# Altium PCB 606-100861-r02.pcbdoc (part 1 of 3)
Units mm, origin at the board's own origin, x right, y up, seen from the top; angles counter-clockwise.
Board outline 64 x 17.5 mm, 4 copper layers (Top Layer, Ground, Power, Bottom Layer), stack 1.551 mm thick; 99 components, 69 nets, 422 pads, 178 vias.
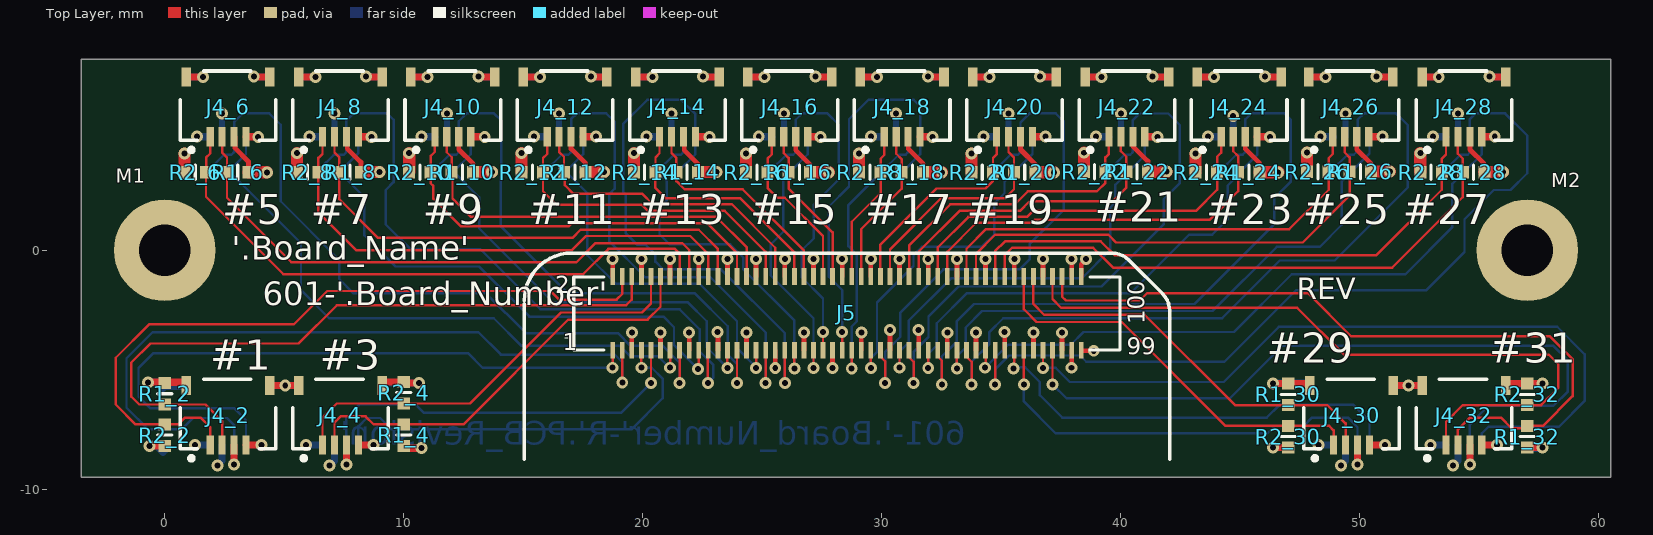
[diagram p0: Top Layer view]
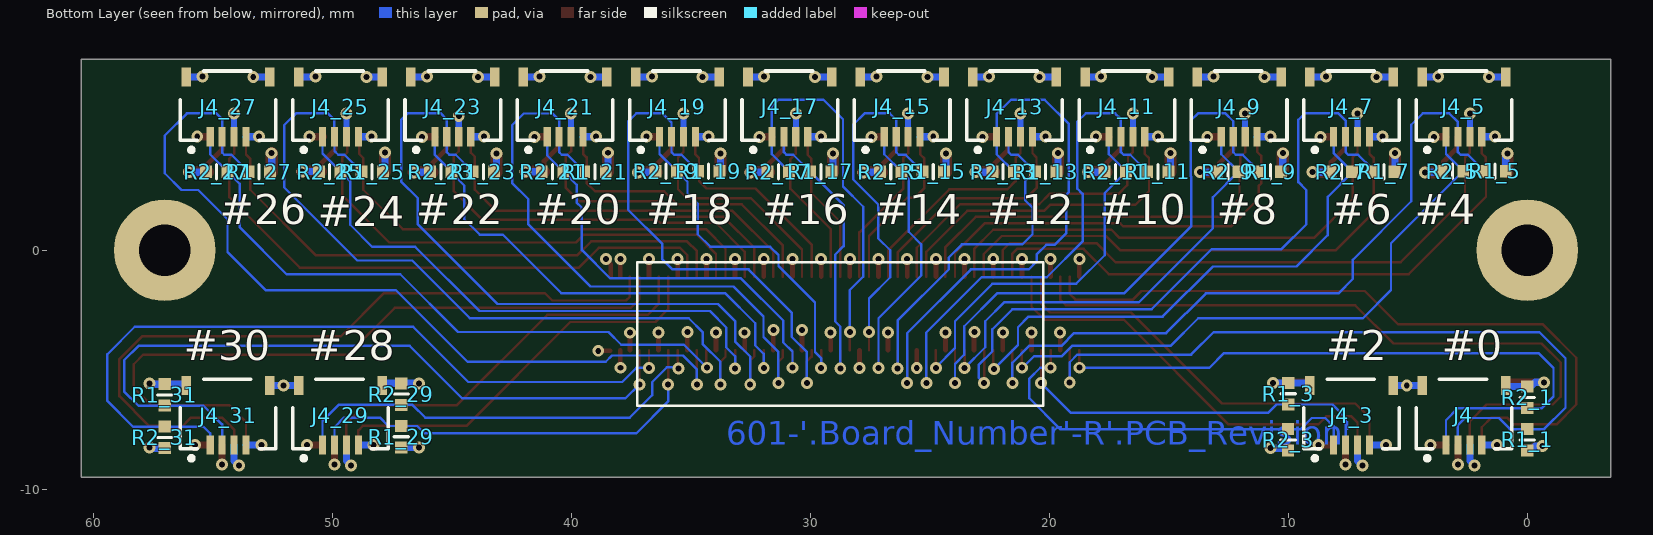
[diagram p1: Bottom Layer view, seen from below]
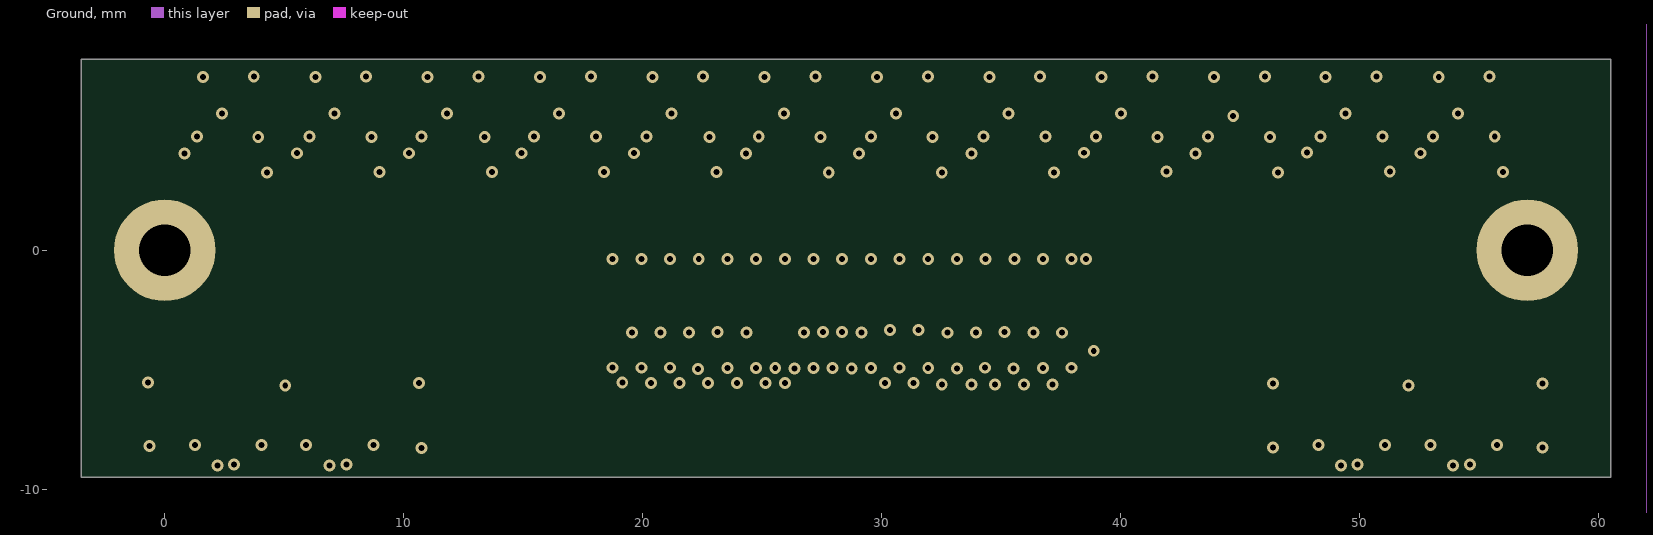
[diagram p2: Ground]
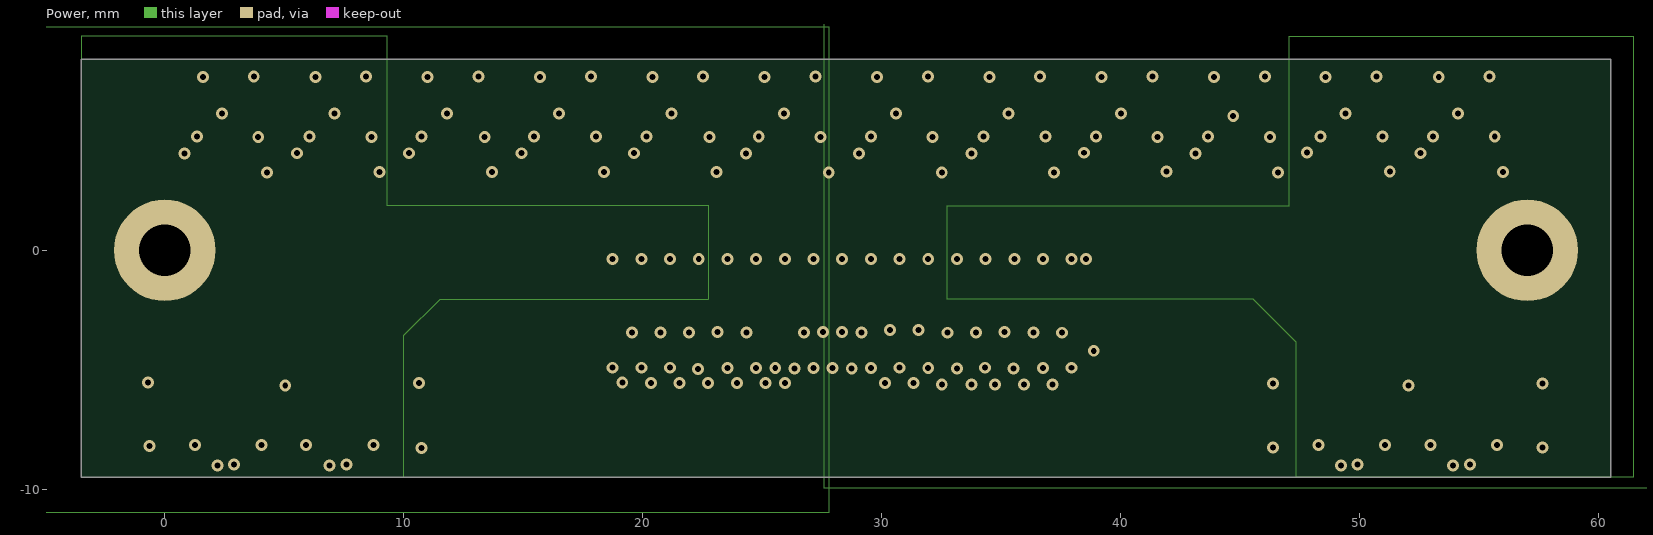
[diagram p3: Power]

## Layer stack, top to bottom
Top Solder: solder mask 0.0102, Solder Resist, Dk 3.5
Top Layer: signal copper 0.0356
Dielectric 1: core 0.254, FR-4, Dk 4.2
Ground: signal copper 0.036
Dielectric 3: prepreg 0.9, Dk 4.2
Power: signal copper 0.036
Dielectric 2: core 0.254, Dk 4.2
Bottom Layer: signal copper 0.0356
Bottom Solder: solder mask 0.0102, Solder Resist, Dk 3.5

## Board outline
-3.5,-9.5 60.5,-9.5 60.5,8 -3.5,8

## Design rules (kind name [scope] priority, off if disabled: settings)
AssemblyTestPointUsage [All] p0 off: scope1count=1 scope1_0_kind=Board scope1_0_value=Board scope2count=1 scope2_0_kind=Board scope2_0_value=Board commentlength=0
AssemblyTestPointUsage [All] p1 off:
AssemblyTestpoint [All] p0 off: scope1count=1 scope1_0_kind=Board scope1_0_value=Board scope2count=1 scope2_0_kind=Board scope2_0_value=Board commentlength=0
AssemblyTestpoint [All] p1 off: testpointundercomponent=TRUE minsize=1.016 maxsize=2.54 preferedsize=1.524 minholesize=0 maxholesize=1.016 preferedholesize=0.813 testpointgrid=0.025 usegrid=TRUE gridtolerance=0 allowsidetop=TRUE allowsidebottom=TRUE
BoardOutlineClearance [All] p0: scope1count=1 scope1_0_kind=Board scope1_0_value=Board scope2count=1 scope2_0_kind=Board scope2_0_value=Board commentlength=0 gap=0.25
BoardOutlineClearance [All] p1: gap=0.25 except(0: Text-OutlineEdge)
Clearance Clearance_1 [All] p0 off: scope1count=1 scope1_0_kind=Board scope1_0_value=Board scope2count=1 scope2_0_kind=Net scope2_0_value=GND commentlength=69 gap=0.254 // Protel DXP Scope 1 Expression Was: InNamedPolygon('VCC_3V3_CORE')
Clearance PWR [All] p0: scope1count=1 scope1_0_kind=Layer scope1_0_value=MID2 scope2count=1 scope2_0_kind=Board scope2_0_value=Board commentlength=0 gap=0.2
Clearance ANT_PIN [All] p0: scope1count=1 scope1_0_kind=PadClass scope1_0_value=RADIO_PIN scope2count=1 scope2_0_kind=Board scope2_0_value=Board commentlength=0 gap=0.25
Clearance Keepout_clear [All] p0 off: scope1count=1 scope1_0_kind=Board scope1_0_value=Board scope2count=1 scope2_0_kind=Layer scope2_0_value=TOP commentlength=48 gap=0 // Protel DXP Scope 1 Expression Was: IsKeepOut
Clearance Narrow_clearance [All] p0: scope1count=1 scope1_0_kind=NetClass scope1_0_value=Narrow scope2count=1 scope2_0_kind=Board scope2_0_value=Board commentlength=0 gap=0.08
Clearance [All] p0: scope1count=1 scope1_0_kind=Board scope1_0_value=Board scope2count=1 scope2_0_kind=Board scope2_0_value=Board commentlength=0 gap=0.1
Clearance RF_Clearance [All] p0: scope1count=1 scope1_0_kind=NetClass scope1_0_value=RF scope2count=1 scope2_0_kind=Board scope2_0_value=Board commentlength=0 gap=0.125
Clearance Polygon_Clearance [All] p0 off: scope1count=1 scope1_0_kind=Board scope1_0_value=Board scope2count=1 scope2_0_kind=Board scope2_0_value=Board commentlength=48 gap=0.1 // Protel DXP Scope 1 Expression Was: InPolygon
Clearance Clearance_1 [InNamedPolygon('VCC_3V3_CORE') vs InNet('GND')] p1: gap=0.254
Clearance PWR [OnLayer('Power')] p2: gap=0.2
Clearance ANT_PIN [InPadClass('RADIO_PIN')] p3: gap=0.25
Clearance Keepout_clear [IsKeepOut vs OnLayer('Top Layer')] p4: gap=0
Clearance Polygon_Clearance [InPolygon] p5: gap=0.1
Clearance Narrow_clearance [InNetClass('Narrow')] p6: gap=0.08
Clearance RF_Clearance [InNetClass('RF')] p7: gap=0.125
Clearance [All] p8: gap=0.1 except(0: Arc-Region Track-Region SMDPad-Region THPad-Region Via-Region Fill-Region Region-Region)
ComponentClearance [All] p0: scope1count=1 scope1_0_kind=Board scope1_0_value=Board scope2count=1 scope2_0_kind=Board scope2_0_value=Board commentlength=0 gap=0.18 collisioncheckmode=3
ComponentClearance [All] p1: gap=0.18 collisioncheckmode=3 verticalgap=0.18 showdistances=FALSE
DiffPairsRouting [All] p0: scope1count=1 scope1_0_kind=Board scope1_0_value=Board scope2count=1 scope2_0_kind=Board scope2_0_value=Board commentlength=0
DiffPairsRouting [All] p1: maxlimit=0.152 minlimit=0.152 mostfreqgap=0.152 toplayer_minwidth=0.25 toplayer_maxwidth=0.318 toplayer_prefwidth=0.318 midlayer1_minwidth=0.25 midlayer1_maxwidth=0.318 midlayer1_prefwidth=0.318 midlayer2_minwidth=0.25 midlayer2_maxwidth=0.318 midlayer2_prefwidth=0.318 bottomlayer_minwidth=0.25 bottomlayer_maxwidth=0.318 bottomlayer_prefwidth=0.318 maxuncoupledlength=12.7
FabricationTestPointUsage [All] p0 off: scope1count=1 scope1_0_kind=Board scope1_0_value=Board scope2count=1 scope2_0_kind=Board scope2_0_value=Board commentlength=0 valid=0 allowmultiple=FALSE
FabricationTestPointUsage [All] p1 off: valid=0 allowmultiple=FALSE
FabricationTestpoint [All] p0 off: scope1count=1 scope1_0_kind=Board scope1_0_value=Board scope2count=1 scope2_0_kind=Board scope2_0_value=Board commentlength=0 side=3 testpointundercomponent=TRUE minsize=1.016 maxsize=2.54 preferedsize=1.524 minholesize=0 maxholesize=1.016 preferedholesize=0.813 testpointgrid=0.025
FabricationTestpoint [All] p1 off: side=3 testpointundercomponent=TRUE minsize=1.016 maxsize=2.54 preferedsize=1.524 minholesize=0 maxholesize=1.016 preferedholesize=0.813 testpointgrid=0.025 allowsidetop=TRUE allowsidebottom=TRUE usegrid=TRUE gridtolerance=0
FanoutControl Fanout_Default [All] p0: scope1count=1 scope1_0_kind=Board scope1_0_value=Board scope2count=1 scope2_0_kind=Board scope2_0_value=Board commentlength=30 // Fanout_Default (Default Rule)
FanoutControl Fanout_Small [All] p0 off: scope1count=1 scope1_0_kind=Board scope1_0_value=Board scope2count=1 scope2_0_kind=Board scope2_0_value=Board commentlength=84 // Protel DXP Scope 1 Expression Was: (CompPinCount < 5)   Fanout_Small (Default Rule)
FanoutControl Fanout_SOIC [All] p0 off: scope1count=1 scope1_0_kind=Board scope1_0_value=Board scope2count=1 scope2_0_kind=Board scope2_0_value=Board commentlength=71 // Protel DXP Scope 1 Expression Was: IsSOIC   Fanout_SOIC (Default Rule)
FanoutControl Fanout_LCC [All] p0 off: scope1count=1 scope1_0_kind=Board scope1_0_value=Board scope2count=1 scope2_0_kind=Board scope2_0_value=Board commentlength=69 // Protel DXP Scope 1 Expression Was: IsLCC   Fanout_LCC (Default Rule)
FanoutControl Fanout_BGA [All] p0 off: scope1count=1 scope1_0_kind=Board scope1_0_value=Board scope2count=1 scope2_0_kind=Board scope2_0_value=Board commentlength=69 // Protel DXP Scope 1 Expression Was: IsBGA   Fanout_BGA (Default Rule)
Height [All] p0: scope1count=1 scope1_0_kind=Board scope1_0_value=Board scope2count=1 scope2_0_kind=Board scope2_0_value=Board commentlength=0
HoleSize [All] p0: scope1count=1 scope1_0_kind=Board scope1_0_value=Board scope2count=1 scope2_0_kind=Board scope2_0_value=Board commentlength=0 absolutevalues=TRUE maxlimit=3.5 minlimit=0.025 maxpercent=80.000 minpercent=20.000
HoleSize [All] p1: absolutevalues=TRUE maxlimit=3.5 minlimit=0.025 maxpercent=80.000 minpercent=20.000
HoleToHoleClearance [All] p0: scope1count=1 scope1_0_kind=Board scope1_0_value=Board scope2count=1 scope2_0_kind=Board scope2_0_value=Board commentlength=0
LayerPairs [All] p0: scope1count=1 scope1_0_kind=Board scope1_0_value=Board scope2count=1 scope2_0_kind=Board scope2_0_value=Board commentlength=0 enforce=TRUE
MinimumSolderMaskSliver MinimumSolderMaskSliver_1 [All] p0 off: scope1count=1 scope1_0_kind=Board scope1_0_value=Board scope2count=1 scope2_0_kind=Board scope2_0_value=Board commentlength=44 // Protel DXP Scope 2 Expression Was: IsPad
MinimumSolderMaskSliver [All] p0: scope1count=1 scope1_0_kind=Board scope1_0_value=Board scope2count=1 scope2_0_kind=Board scope2_0_value=Board commentlength=0
MinimumSolderMaskSliver MinimumSolderMaskSliver_1 [isvia vs IsPad] p1: minsoldermaskwidth=0
MinimumSolderMaskSliver [All] p2: minsoldermaskwidth=0.05
NetAntennae [All] p0: scope1count=1 scope1_0_kind=Board scope1_0_value=Board scope2count=1 scope2_0_kind=Board scope2_0_value=Board commentlength=0
PasteMaskExpansion [All] p0: scope1count=1 scope1_0_kind=Board scope1_0_value=Board scope2count=1 scope2_0_kind=Board scope2_0_value=Board commentlength=0 expansion=0
PlaneClearance [All] p0: scope1count=1 scope1_0_kind=Board scope1_0_value=Board scope2count=1 scope2_0_kind=Board scope2_0_value=Board commentlength=0 clearance=0.25
PlaneClearance [All] p1: clearance=0.25
PlaneConnect [All] p0: scope1count=1 scope1_0_kind=Board scope1_0_value=Board scope2count=1 scope2_0_kind=Board scope2_0_value=Board commentlength=0 planeconnectstyle=Direct reliefexpansion=0.508 reliefentries=4 reliefconductorwidth=0.254 reliefairgap=0.254
PlaneConnect [All] p1: planeconnectstyle=Direct reliefexpansion=0.508 reliefentries=4 reliefconductorwidth=0.254 reliefairgap=0.254
PolygonConnect MTG_CONNECT [All] p0: scope1count=1 scope1_0_kind=Footprint scope1_0_value=standoff_hole2p50p scope2count=1 scope2_0_kind=Board scope2_0_value=Board commentlength=0 connectstyle=Relief reliefconductorwidth=0.4 reliefentries=4 polygonreliefangle="90 Angle"
PolygonConnect THPin [All] p0: scope1count=1 scope1_0_kind=Board scope1_0_value=Board scope2count=1 scope2_0_kind=PadClass scope2_0_value=THPin_Polygon commentlength=0 connectstyle=Relief reliefconductorwidth=0.254 reliefentries=4 polygonreliefangle="90 Angle"
PolygonConnect [All] p0: scope1count=1 scope1_0_kind=Board scope1_0_value=Board scope2count=1 scope2_0_kind=Board scope2_0_value=Board commentlength=0 connectstyle=Relief reliefconductorwidth=0.25 reliefentries=4 polygonreliefangle="90 Angle"
PolygonConnect POLY_VIA [All] p0 off: scope1count=1 scope1_0_kind=Board scope1_0_value=Board scope2count=1 scope2_0_kind=Board scope2_0_value=Board commentlength=48 connectstyle=Direct reliefconductorwidth=0.254 reliefentries=4 polygonreliefangle="90 Angle" // Protel DXP Scope 2 Expression Was: IsPolygon
PolygonConnect MTG_CONNECT [HasFootprint('standoff_hole2p50p')] p1: connectstyle=Relief reliefconductorwidth=0.4 reliefentries=4 polygonreliefangle="90 Angle" airgapwidth=0.25
PolygonConnect THPin [All vs InPadClass('THPin_Polygon')] p2: connectstyle=Relief reliefconductorwidth=0.254 reliefentries=4 polygonreliefangle="90 Angle" airgapwidth=0.254
PolygonConnect POLY_VIA [IsVia vs IsPolygon] p3: connectstyle=Direct reliefconductorwidth=0.254 reliefentries=4 polygonreliefangle="90 Angle" airgapwidth=0.254
PolygonConnect [All] p4: connectstyle=Relief reliefconductorwidth=0.25 reliefentries=4 polygonreliefangle="90 Angle" airgapwidth=0.125
RoomDefinition U_SensorConn320 [All] p0: scope1count=1 scope1_0_kind=ComponentClass scope1_0_value=U_SensorConn320 scope2count=1 scope2_0_kind=Board scope2_0_value=Board commentlength=0 region_x1=0 region_y1=0 region_x2=20000000 region_y2=10000000 confinementstyle=ConfineIn
RoomDefinition SensorBreakout [All] p0: scope1count=1 scope1_0_kind=ComponentClass scope1_0_value=SensorBreakout scope2count=1 scope2_0_kind=Board scope2_0_value=Board commentlength=0 region_x1=0 region_y1=0 region_x2=20000000 region_y2=10000000 confinementstyle=ConfineIn
RoomDefinition U_SensorConn11 [All] p0: scope1count=1 scope1_0_kind=ComponentClass scope1_0_value=U_SensorConn11 scope2count=1 scope2_0_kind=Board scope2_0_value=Board commentlength=0 region_x1=0 region_y1=0 region_x2=20000000 region_y2=10000000 confinementstyle=ConfineIn
RoomDefinition U_SensorConn12 [All] p0: scope1count=1 scope1_0_kind=ComponentClass scope1_0_value=U_SensorConn12 scope2count=1 scope2_0_kind=Board scope2_0_value=Board commentlength=0 region_x1=0 region_y1=0 region_x2=20000000 region_y2=10000000 confinementstyle=ConfineIn
RoomDefinition U_SensorConn13 [All] p0: scope1count=1 scope1_0_kind=ComponentClass scope1_0_value=U_SensorConn13 scope2count=1 scope2_0_kind=Board scope2_0_value=Board commentlength=0 region_x1=0 region_y1=0 region_x2=20000000 region_y2=10000000 confinementstyle=ConfineIn
RoomDefinition U_SensorConn14 [All] p0: scope1count=1 scope1_0_kind=ComponentClass scope1_0_value=U_SensorConn14 scope2count=1 scope2_0_kind=Board scope2_0_value=Board commentlength=0 region_x1=0 region_y1=0 region_x2=20000000 region_y2=10000000 confinementstyle=ConfineIn
RoomDefinition U_SensorConn15 [All] p0: scope1count=1 scope1_0_kind=ComponentClass scope1_0_value=U_SensorConn15 scope2count=1 scope2_0_kind=Board scope2_0_value=Board commentlength=0 region_x1=0 region_y1=0 region_x2=20000000 region_y2=10000000 confinementstyle=ConfineIn
RoomDefinition U_SensorConn16 [All] p0: scope1count=1 scope1_0_kind=ComponentClass scope1_0_value=U_SensorConn16 scope2count=1 scope2_0_kind=Board scope2_0_value=Board commentlength=0 region_x1=0 region_y1=0 region_x2=20000000 region_y2=10000000 confinementstyle=ConfineIn
RoomDefinition U_SensorConn17 [All] p0: scope1count=1 scope1_0_kind=ComponentClass scope1_0_value=U_SensorConn17 scope2count=1 scope2_0_kind=Board scope2_0_value=Board commentlength=0 region_x1=0 region_y1=0 region_x2=20000000 region_y2=10000000 confinementstyle=ConfineIn
RoomDefinition U_SensorConn18 [All] p0: scope1count=1 scope1_0_kind=ComponentClass scope1_0_value=U_SensorConn18 scope2count=1 scope2_0_kind=Board scope2_0_value=Board commentlength=0 region_x1=0 region_y1=0 region_x2=20000000 region_y2=10000000 confinementstyle=ConfineIn
RoomDefinition U_SensorConn29 [All] p0: scope1count=1 scope1_0_kind=ComponentClass scope1_0_value=U_SensorConn29 scope2count=1 scope2_0_kind=Board scope2_0_value=Board commentlength=0 region_x1=0 region_y1=0 region_x2=20000000 region_y2=10000000 confinementstyle=ConfineIn
RoomDefinition U_SensorConn210 [All] p0: scope1count=1 scope1_0_kind=ComponentClass scope1_0_value=U_SensorConn210 scope2count=1 scope2_0_kind=Board scope2_0_value=Board commentlength=0 region_x1=0 region_y1=0 region_x2=20000000 region_y2=10000000 confinementstyle=ConfineIn
RoomDefinition U_SensorConn211 [All] p0: scope1count=1 scope1_0_kind=ComponentClass scope1_0_value=U_SensorConn211 scope2count=1 scope2_0_kind=Board scope2_0_value=Board commentlength=0 region_x1=0 region_y1=0 region_x2=20000000 region_y2=10000000 confinementstyle=ConfineIn
RoomDefinition U_SensorConn212 [All] p0: scope1count=1 scope1_0_kind=ComponentClass scope1_0_value=U_SensorConn212 scope2count=1 scope2_0_kind=Board scope2_0_value=Board commentlength=0 region_x1=0 region_y1=0 region_x2=20000000 region_y2=10000000 confinementstyle=ConfineIn
RoomDefinition U_SensorConn213 [All] p0: scope1count=1 scope1_0_kind=ComponentClass scope1_0_value=U_SensorConn213 scope2count=1 scope2_0_kind=Board scope2_0_value=Board commentlength=0 region_x1=0 region_y1=0 region_x2=20000000 region_y2=10000000 confinementstyle=ConfineIn
RoomDefinition U_SensorConn214 [All] p0: scope1count=1 scope1_0_kind=ComponentClass scope1_0_value=U_SensorConn214 scope2count=1 scope2_0_kind=Board scope2_0_value=Board commentlength=0 region_x1=0 region_y1=0 region_x2=20000000 region_y2=10000000 confinementstyle=ConfineIn
RoomDefinition U_SensorConn215 [All] p0: scope1count=1 scope1_0_kind=ComponentClass scope1_0_value=U_SensorConn215 scope2count=1 scope2_0_kind=Board scope2_0_value=Board commentlength=0 region_x1=0 region_y1=0 region_x2=20000000 region_y2=10000000 confinementstyle=ConfineIn
RoomDefinition U_SensorConn216 [All] p0: scope1count=1 scope1_0_kind=ComponentClass scope1_0_value=U_SensorConn216 scope2count=1 scope2_0_kind=Board scope2_0_value=Board commentlength=0 region_x1=0 region_y1=0 region_x2=20000000 region_y2=10000000 confinementstyle=ConfineIn
RoomDefinition U_SensorConn317 [All] p0: scope1count=1 scope1_0_kind=ComponentClass scope1_0_value=U_SensorConn317 scope2count=1 scope2_0_kind=Board scope2_0_value=Board commentlength=0 region_x1=0 region_y1=0 region_x2=20000000 region_y2=10000000 confinementstyle=ConfineIn
RoomDefinition U_SensorConn318 [All] p0: scope1count=1 scope1_0_kind=ComponentClass scope1_0_value=U_SensorConn318 scope2count=1 scope2_0_kind=Board scope2_0_value=Board commentlength=0 region_x1=0 region_y1=0 region_x2=20000000 region_y2=10000000 confinementstyle=ConfineIn
RoomDefinition U_SensorConn319 [All] p0: scope1count=1 scope1_0_kind=ComponentClass scope1_0_value=U_SensorConn319 scope2count=1 scope2_0_kind=Board scope2_0_value=Board commentlength=0 region_x1=0 region_y1=0 region_x2=20000000 region_y2=10000000 confinementstyle=ConfineIn
RoomDefinition U_SensorConn321 [All] p0: scope1count=1 scope1_0_kind=ComponentClass scope1_0_value=U_SensorConn321 scope2count=1 scope2_0_kind=Board scope2_0_value=Board commentlength=0 region_x1=0 region_y1=0 region_x2=20000000 region_y2=10000000 confinementstyle=ConfineIn
RoomDefinition U_SensorConn322 [All] p0: scope1count=1 scope1_0_kind=ComponentClass scope1_0_value=U_SensorConn322 scope2count=1 scope2_0_kind=Board scope2_0_value=Board commentlength=0 region_x1=0 region_y1=0 region_x2=20000000 region_y2=10000000 confinementstyle=ConfineIn
RoomDefinition U_SensorConn323 [All] p0: scope1count=1 scope1_0_kind=ComponentClass scope1_0_value=U_SensorConn323 scope2count=1 scope2_0_kind=Board scope2_0_value=Board commentlength=0 region_x1=0 region_y1=0 region_x2=20000000 region_y2=10000000 confinementstyle=ConfineIn
RoomDefinition U_SensorConn324 [All] p0: scope1count=1 scope1_0_kind=ComponentClass scope1_0_value=U_SensorConn324 scope2count=1 scope2_0_kind=Board scope2_0_value=Board commentlength=0 region_x1=0 region_y1=0 region_x2=20000000 region_y2=10000000 confinementstyle=ConfineIn
RoomDefinition U_SensorConn425 [All] p0: scope1count=1 scope1_0_kind=ComponentClass scope1_0_value=U_SensorConn425 scope2count=1 scope2_0_kind=Board scope2_0_value=Board commentlength=0 region_x1=0 region_y1=0 region_x2=20000000 region_y2=10000000 confinementstyle=ConfineIn
RoomDefinition U_SensorConn426 [All] p0: scope1count=1 scope1_0_kind=ComponentClass scope1_0_value=U_SensorConn426 scope2count=1 scope2_0_kind=Board scope2_0_value=Board commentlength=0 region_x1=0 region_y1=0 region_x2=20000000 region_y2=10000000 confinementstyle=ConfineIn
RoomDefinition U_SensorConn427 [All] p0: scope1count=1 scope1_0_kind=ComponentClass scope1_0_value=U_SensorConn427 scope2count=1 scope2_0_kind=Board scope2_0_value=Board commentlength=0 region_x1=0 region_y1=0 region_x2=20000000 region_y2=10000000 confinementstyle=ConfineIn
RoomDefinition U_SensorConn428 [All] p0: scope1count=1 scope1_0_kind=ComponentClass scope1_0_value=U_SensorConn428 scope2count=1 scope2_0_kind=Board scope2_0_value=Board commentlength=0 region_x1=0 region_y1=0 region_x2=20000000 region_y2=10000000 confinementstyle=ConfineIn
RoomDefinition U_SensorConn429 [All] p0: scope1count=1 scope1_0_kind=ComponentClass scope1_0_value=U_SensorConn429 scope2count=1 scope2_0_kind=Board scope2_0_value=Board commentlength=0 region_x1=0 region_y1=0 region_x2=20000000 region_y2=10000000 confinementstyle=ConfineIn
RoomDefinition U_SensorConn430 [All] p0: scope1count=1 scope1_0_kind=ComponentClass scope1_0_value=U_SensorConn430 scope2count=1 scope2_0_kind=Board scope2_0_value=Board commentlength=0 region_x1=0 region_y1=0 region_x2=20000000 region_y2=10000000 confinementstyle=ConfineIn
RoomDefinition U_SensorConn431 [All] p0: scope1count=1 scope1_0_kind=ComponentClass scope1_0_value=U_SensorConn431 scope2count=1 scope2_0_kind=Board scope2_0_value=Board commentlength=0 region_x1=0 region_y1=0 region_x2=20000000 region_y2=10000000 confinementstyle=ConfineIn
RoomDefinition U_SensorConn432 [All] p0: scope1count=1 scope1_0_kind=ComponentClass scope1_0_value=U_SensorConn432 scope2count=1 scope2_0_kind=Board scope2_0_value=Board commentlength=0 region_x1=0 region_y1=0 region_x2=20000000 region_y2=10000000 confinementstyle=ConfineIn
RoomDefinition U_SensorConn320 [InComponentClass('U_SensorConn320')] p1: confinementstyle=ConfineIn formatcopy=TRUE lockcomponents=FALSE outline -388.768,-211.633 -337.968,-211.633 -337.968,-186.233 -388.768,-186.233
RoomDefinition SensorBreakout [InComponentClass('SensorBreakout')] p2: confinementstyle=ConfineIn formatcopy=TRUE lockcomponents=FALSE outline -388.768,-211.633 -337.968,-211.633 -337.968,-186.233 -388.768,-186.233
RoomDefinition U_SensorConn432 [InComponentClass('U_SensorConn432')] p3: confinementstyle=ConfineIn formatcopy=TRUE lockcomponents=FALSE outline -388.768,-211.633 -337.968,-211.633 -337.968,-186.233 -388.768,-186.233
RoomDefinition U_SensorConn431 [InComponentClass('U_SensorConn431')] p4: confinementstyle=ConfineIn formatcopy=TRUE lockcomponents=FALSE outline -388.768,-211.633 -337.968,-211.633 -337.968,-186.233 -388.768,-186.233
RoomDefinition U_SensorConn430 [InComponentClass('U_SensorConn430')] p5: confinementstyle=ConfineIn formatcopy=TRUE lockcomponents=FALSE outline -388.768,-211.633 -337.968,-211.633 -337.968,-186.233 -388.768,-186.233
RoomDefinition U_SensorConn429 [InComponentClass('U_SensorConn429')] p6: confinementstyle=ConfineIn formatcopy=TRUE lockcomponents=FALSE outline -388.768,-211.633 -337.968,-211.633 -337.968,-186.233 -388.768,-186.233
RoomDefinition U_SensorConn428 [InComponentClass('U_SensorConn428')] p7: confinementstyle=ConfineIn formatcopy=TRUE lockcomponents=FALSE outline -388.768,-211.633 -337.968,-211.633 -337.968,-186.233 -388.768,-186.233
RoomDefinition U_SensorConn427 [InComponentClass('U_SensorConn427')] p8: confinementstyle=ConfineIn formatcopy=TRUE lockcomponents=FALSE outline -388.768,-211.633 -337.968,-211.633 -337.968,-186.233 -388.768,-186.233
RoomDefinition U_SensorConn426 [InComponentClass('U_SensorConn426')] p9: confinementstyle=ConfineIn formatcopy=TRUE lockcomponents=FALSE outline -388.768,-211.633 -337.968,-211.633 -337.968,-186.233 -388.768,-186.233
RoomDefinition U_SensorConn425 [InComponentClass('U_SensorConn425')] p10: confinementstyle=ConfineIn formatcopy=TRUE lockcomponents=FALSE outline -388.768,-211.633 -337.968,-211.633 -337.968,-186.233 -388.768,-186.233
RoomDefinition U_SensorConn324 [InComponentClass('U_SensorConn324')] p11: confinementstyle=ConfineIn formatcopy=TRUE lockcomponents=FALSE outline -388.768,-211.633 -337.968,-211.633 -337.968,-186.233 -388.768,-186.233
RoomDefinition U_SensorConn323 [InComponentClass('U_SensorConn323')] p12: confinementstyle=ConfineIn formatcopy=TRUE lockcomponents=FALSE outline -388.768,-211.633 -337.968,-211.633 -337.968,-186.233 -388.768,-186.233
RoomDefinition U_SensorConn322 [InComponentClass('U_SensorConn322')] p13: confinementstyle=ConfineIn formatcopy=TRUE lockcomponents=FALSE outline -388.768,-211.633 -337.968,-211.633 -337.968,-186.233 -388.768,-186.233
RoomDefinition U_SensorConn321 [InComponentClass('U_SensorConn321')] p14: confinementstyle=ConfineIn formatcopy=TRUE lockcomponents=FALSE outline -388.768,-211.633 -337.968,-211.633 -337.968,-186.233 -388.768,-186.233
RoomDefinition U_SensorConn319 [InComponentClass('U_SensorConn319')] p15: confinementstyle=ConfineIn formatcopy=TRUE lockcomponents=FALSE outline -388.768,-211.633 -337.968,-211.633 -337.968,-186.233 -388.768,-186.233
RoomDefinition U_SensorConn318 [InComponentClass('U_SensorConn318')] p16: confinementstyle=ConfineIn formatcopy=TRUE lockcomponents=FALSE outline -388.768,-211.633 -337.968,-211.633 -337.968,-186.233 -388.768,-186.233
RoomDefinition U_SensorConn317 [InComponentClass('U_SensorConn317')] p17: confinementstyle=ConfineIn formatcopy=TRUE lockcomponents=FALSE outline -388.768,-211.633 -337.968,-211.633 -337.968,-186.233 -388.768,-186.233
RoomDefinition U_SensorConn216 [InComponentClass('U_SensorConn216')] p18: confinementstyle=ConfineIn formatcopy=TRUE lockcomponents=FALSE outline -388.768,-211.633 -337.968,-211.633 -337.968,-186.233 -388.768,-186.233
RoomDefinition U_SensorConn215 [InComponentClass('U_SensorConn215')] p19: confinementstyle=ConfineIn formatcopy=TRUE lockcomponents=FALSE outline -388.768,-211.633 -337.968,-211.633 -337.968,-186.233 -388.768,-186.233
RoomDefinition U_SensorConn214 [InComponentClass('U_SensorConn214')] p20: confinementstyle=ConfineIn formatcopy=TRUE lockcomponents=FALSE outline -388.768,-211.633 -337.968,-211.633 -337.968,-186.233 -388.768,-186.233
RoomDefinition U_SensorConn213 [InComponentClass('U_SensorConn213')] p21: confinementstyle=ConfineIn formatcopy=TRUE lockcomponents=FALSE outline -388.768,-211.633 -337.968,-211.633 -337.968,-186.233 -388.768,-186.233
RoomDefinition U_SensorConn212 [InComponentClass('U_SensorConn212')] p22: confinementstyle=ConfineIn formatcopy=TRUE lockcomponents=FALSE outline -388.768,-211.633 -337.968,-211.633 -337.968,-186.233 -388.768,-186.233
RoomDefinition U_SensorConn211 [InComponentClass('U_SensorConn211')] p23: confinementstyle=ConfineIn formatcopy=TRUE lockcomponents=FALSE outline -388.768,-211.633 -337.968,-211.633 -337.968,-186.233 -388.768,-186.233
RoomDefinition U_SensorConn210 [InComponentClass('U_SensorConn210')] p24: confinementstyle=ConfineIn formatcopy=TRUE lockcomponents=FALSE outline -388.768,-211.633 -337.968,-211.633 -337.968,-186.233 -388.768,-186.233
RoomDefinition U_SensorConn29 [InComponentClass('U_SensorConn29')] p25: confinementstyle=ConfineIn formatcopy=TRUE lockcomponents=FALSE outline -388.768,-211.633 -337.968,-211.633 -337.968,-186.233 -388.768,-186.233
RoomDefinition U_SensorConn18 [InComponentClass('U_SensorConn18')] p26: confinementstyle=ConfineIn formatcopy=TRUE lockcomponents=FALSE outline -388.768,-211.633 -337.968,-211.633 -337.968,-186.233 -388.768,-186.233
RoomDefinition U_SensorConn17 [InComponentClass('U_SensorConn17')] p27: confinementstyle=ConfineIn formatcopy=TRUE lockcomponents=FALSE outline -388.768,-211.633 -337.968,-211.633 -337.968,-186.233 -388.768,-186.233
RoomDefinition U_SensorConn16 [InComponentClass('U_SensorConn16')] p28: confinementstyle=ConfineIn formatcopy=TRUE lockcomponents=FALSE outline -388.768,-211.633 -337.968,-211.633 -337.968,-186.233 -388.768,-186.233
RoomDefinition U_SensorConn15 [InComponentClass('U_SensorConn15')] p29: confinementstyle=ConfineIn formatcopy=TRUE lockcomponents=FALSE outline -388.768,-211.633 -337.968,-211.633 -337.968,-186.233 -388.768,-186.233
RoomDefinition U_SensorConn14 [InComponentClass('U_SensorConn14')] p30: confinementstyle=ConfineIn formatcopy=TRUE lockcomponents=FALSE outline -388.768,-211.633 -337.968,-211.633 -337.968,-186.233 -388.768,-186.233
RoomDefinition U_SensorConn13 [InComponentClass('U_SensorConn13')] p31: confinementstyle=ConfineIn formatcopy=TRUE lockcomponents=FALSE outline -388.768,-211.633 -337.968,-211.633 -337.968,-186.233 -388.768,-186.233
RoomDefinition U_SensorConn12 [InComponentClass('U_SensorConn12')] p32: confinementstyle=ConfineIn formatcopy=TRUE lockcomponents=FALSE outline -388.768,-211.633 -337.968,-211.633 -337.968,-186.233 -388.768,-186.233
RoomDefinition U_SensorConn11 [InComponentClass('U_SensorConn11')] p33: confinementstyle=ConfineIn formatcopy=TRUE lockcomponents=FALSE outline -388.768,-211.633 -337.968,-211.633 -337.968,-186.233 -388.768,-186.233
RoutingCorners [All] p0: scope1count=1 scope1_0_kind=Board scope1_0_value=Board scope2count=1 scope2_0_kind=Board scope2_0_value=Board commentlength=0 cornerstyle=45-Degree minsetback=2.54 maxsetback=2.54
RoutingLayers [All] p0: scope1count=1 scope1_0_kind=Board scope1_0_value=Board scope2count=1 scope2_0_kind=Board scope2_0_value=Board commentlength=0 top layer=Automatic mid layer 1=Automatic mid layer 2=Automatic bottom layer=Automatic
RoutingPriority [All] p0: scope1count=1 scope1_0_kind=Board scope1_0_value=Board scope2count=1 scope2_0_kind=Board scope2_0_value=Board commentlength=0
RoutingTopology [All] p0: scope1count=1 scope1_0_kind=Board scope1_0_value=Board scope2count=1 scope2_0_kind=Board scope2_0_value=Board commentlength=0 topology=Shortest
RoutingVias [All] p0: scope1count=1 scope1_0_kind=Board scope1_0_value=Board scope2count=1 scope2_0_kind=Board scope2_0_value=Board commentlength=0 holewidth=0.25 width=0.5 viastyle="Through Hole" minholewidth=0.25 minwidth=0.5 maxholewidth=0.25 maxwidth=0.5
RoutingVias [All] p1: holewidth=0.25 width=0.5 viastyle="Through Hole" minholewidth=0.25 minwidth=0.5 maxholewidth=0.25 maxwidth=0.5 useviatemplates=TRUE viatemplateguid#1={2D41CD12-448D-474D-BA40-36D4687D2B42} viatemplatename#1=v50h25m0mx0
ShortCircuit [All] p0: scope1count=1 scope1_0_kind=Board scope1_0_value=Board scope2count=1 scope2_0_kind=Board scope2_0_value=Board commentlength=0 allowed=FALSE
SilkToBoardRegionClearance [All] p0: scope1count=1 scope1_0_kind=Board scope1_0_value=Board scope2count=1 scope2_0_kind=Board scope2_0_value=Board commentlength=0
SilkToSilkClearance [All] p0 off: scope1count=1 scope1_0_kind=Board scope1_0_value=Board scope2count=1 scope2_0_kind=Board scope2_0_value=Board commentlength=0
SilkToSilkClearance [All] p1 off: silktosilkclearance=0
SilkToSolderMaskClearance [All] p0 off: scope1count=1 scope1_0_kind=Board scope1_0_value=Board scope2count=1 scope2_0_kind=Board scope2_0_value=Board commentlength=44 // Protel DXP Scope 1 Expression Was: IsPad
SilkToSolderMaskClearance [IsPad] p1: minsilkscreentomaskgap=0.05 clearancetoexposedcopper=TRUE
SolderMaskExpansion [All] p0: scope1count=1 scope1_0_kind=Board scope1_0_value=Board scope2count=1 scope2_0_kind=Board scope2_0_value=Board commentlength=0 expansion=0.05
SolderMaskExpansion [All] p1: expansion=0.05
UnRoutedNet [All] p0: scope1count=1 scope1_0_kind=Board scope1_0_value=Board scope2count=1 scope2_0_kind=Board scope2_0_value=Board commentlength=0
UnpouredPolygon [All] p0: scope1count=1 scope1_0_kind=Board scope1_0_value=Board scope2count=1 scope2_0_kind=Board scope2_0_value=Board commentlength=0
Width Narrow [All] p0: scope1count=1 scope1_0_kind=NetClass scope1_0_value=Narrow scope2count=1 scope2_0_kind=Board scope2_0_value=Board commentlength=0 maxlimit=0.1 minlimit=0.08 preferedwidth=0.1
Width CRITICAL [All] p0: scope1count=1 scope1_0_kind=NetClass scope1_0_value=MOTOR_DRIVERS scope2count=1 scope2_0_kind=Board scope2_0_value=Board commentlength=0 maxlimit=0.4 minlimit=0.3 preferedwidth=0.4
Width PWR_GND [All] p0: scope1count=1 scope1_0_kind=NetClass scope1_0_value=PWR_GND scope2count=1 scope2_0_kind=Board scope2_0_value=Board commentlength=0 maxlimit=1 minlimit=0.2 preferedwidth=0.3
Width [All] p0: scope1count=1 scope1_0_kind=Board scope1_0_value=Board scope2count=1 scope2_0_kind=Board scope2_0_value=Board commentlength=0 maxlimit=0.508 minlimit=0.1 preferedwidth=0.1
Width RF_Width [All] p0: scope1count=1 scope1_0_kind=NetClass scope1_0_value=RF scope2count=1 scope2_0_kind=Board scope2_0_value=Board commentlength=0 maxlimit=0.59 minlimit=0.2 preferedwidth=0.59
Width Narrow [InNetClass('Narrow')] p1: maxlimit=0.1 minlimit=0.08 preferedwidth=0.1
Width RF_Width [InNetClass('RF')] p2: maxlimit=0.59 minlimit=0.2 preferedwidth=0.59
Width PWR_GND [InNetClass('PWR_GND')] p3: maxlimit=1 minlimit=0.2 preferedwidth=0.3
Width CRITICAL [InNetClass('MOTOR_DRIVERS')] p4: maxlimit=0.4 minlimit=0.3 preferedwidth=0.4
Width [All] p5: maxlimit=0.508 minlimit=0.1 preferedwidth=0.1
18 further rules are at their usual default settings.

## Classes and differential pairs
component class SensorBreakout: J5 M1 M2
channel class SensorConn: U_SensorConn11 U_SensorConn12 U_SensorConn13 U_SensorConn14 U_SensorConn15 U_SensorConn16 U_SensorConn17 U_SensorConn18 U_SensorConn29 U_SensorConn210 U_SensorConn211 U_SensorConn212 U_SensorConn213 U_SensorConn214 U_SensorConn215 U_SensorConn216 U_SensorConn317 U_SensorConn318 U_SensorConn319 U_SensorConn320 U_SensorConn321 U_SensorConn322 U_SensorConn323 U_SensorConn324 U_SensorConn425 U_SensorConn426 U_SensorConn427 U_SensorConn428 U_SensorConn429 U_SensorConn430 U_SensorConn431 U_SensorConn432
net class SENSOR_VCC[1..4]: SENSOR_VCC1 SENSOR_VCC2 SENSOR_VCC3 SENSOR_VCC4
net class SENSOR_B[1..32]: SENSOR_B1 SENSOR_B2 SENSOR_B3 SENSOR_B4 SENSOR_B5 SENSOR_B6 SENSOR_B7 SENSOR_B8 SENSOR_B9 SENSOR_B10 SENSOR_B11 SENSOR_B12 SENSOR_B13 SENSOR_B14 SENSOR_B15 SENSOR_B16 SENSOR_B17 SENSOR_B18 SENSOR_B19 SENSOR_B20 SENSOR_B21 SENSOR_B22 SENSOR_B23 SENSOR_B24 SENSOR_B25 SENSOR_B26 SENSOR_B27 SENSOR_B28 SENSOR_B29 SENSOR_B30 SENSOR_B31 SENSOR_B32
net class SENSOR_A[1..32]: SENSOR_A1 SENSOR_A2 SENSOR_A3 SENSOR_A4 SENSOR_A5 SENSOR_A6 SENSOR_A7 SENSOR_A8 SENSOR_A9 SENSOR_A10 SENSOR_A11 SENSOR_A12 SENSOR_A13 SENSOR_A14 SENSOR_A15 SENSOR_A16 SENSOR_A17 SENSOR_A18 SENSOR_A19 SENSOR_A20 SENSOR_A21 SENSOR_A22 SENSOR_A23 SENSOR_A24 SENSOR_A25 SENSOR_A26 SENSOR_A27 SENSOR_A28 SENSOR_A29 SENSOR_A30 SENSOR_A31 SENSOR_A32
component class U_SensorConn432: J4_32 R1_32 R2_32
component class U_SensorConn431: J4_31 R1_31 R2_31
component class U_SensorConn430: J4_30 R1_30 R2_30
component class U_SensorConn429: J4_29 R1_29 R2_29
component class U_SensorConn428: J4_28 R1_28 R2_28
component class U_SensorConn427: J4_27 R1_27 R2_27
component class U_SensorConn426: J4_26 R1_26 R2_26
component class U_SensorConn425: J4_25 R1_25 R2_25
component class U_SensorConn324: J4_24 R1_24 R2_24
component class U_SensorConn323: J4_23 R1_23 R2_23
component class U_SensorConn322: J4_22 R1_22 R2_22
component class U_SensorConn321: J4_21 R1_21 R2_21
component class U_SensorConn320: J4_20 R1_20 R2_20
component class U_SensorConn319: J4_19 R1_19 R2_19
component class U_SensorConn318: J4_18 R1_18 R2_18
component class U_SensorConn317: J4_17 R1_17 R2_17
component class U_SensorConn216: J4_16 R1_16 R2_16
component class U_SensorConn215: J4_15 R1_15 R2_15
component class U_SensorConn214: J4_14 R1_14 R2_14
component class U_SensorConn213: J4_13 R1_13 R2_13
component class U_SensorConn212: J4_12 R1_12 R2_12
component class U_SensorConn211: J4_11 R1_11 R2_11
component class U_SensorConn210: J4_10 R1_10 R2_10
component class U_SensorConn29: J4_9 R1_9 R2_9
component class U_SensorConn18: J4_8 R1_8 R2_8
component class U_SensorConn17: J4_7 R1_7 R2_7
component class U_SensorConn16: J4_6 R1_6 R2_6
component class U_SensorConn15: J4_5 R1_5 R2_5
component class U_SensorConn14: J4_4 R1_4 R2_4
component class U_SensorConn13: J4_3 R1_3 R2_3
component class U_SensorConn12: J4_2 R1_2 R2_2
component class U_SensorConn11: J4_1 R1_1 R2_1

## Components (designator, comment, footprint, x,y, rotation, side; value= is the part's Value field where it differs from the comment)
J4 "FH34S-4S-0.5SH" con_hirose_FH34SRJ-4S 2.65,-5.4 r180 bottom
J4_2 "FH34S-4S-0.5SH" con_hirose_FH34SRJ-4S 2.65,-5.4 r0 top (schematic designator J4)
J4_3 "FH34S-4S-0.5SH" con_hirose_FH34SRJ-4S 7.35,-5.4 r180 bottom (schematic designator J4)
J4_4 "FH34S-4S-0.5SH" con_hirose_FH34SRJ-4S 7.35,-5.4 r0 top (schematic designator J4)
J4_5 "FH34S-4S-0.5SH" con_hirose_FH34SRJ-4S 2.65,7.5 r180 bottom (schematic designator J4)
J4_6 "FH34S-4S-0.5SH" con_hirose_FH34SRJ-4S 2.65,7.5 r0 top (schematic designator J4)
J4_7 "FH34S-4S-0.5SH" con_hirose_FH34SRJ-4S 7.35,7.5 r180 bottom (schematic designator J4)
J4_8 "FH34S-4S-0.5SH" con_hirose_FH34SRJ-4S 7.35,7.5 r0 top (schematic designator J4)
J4_9 "FH34S-4S-0.5SH" con_hirose_FH34SRJ-4S 12.05,7.5 r180 bottom (schematic designator J4)
J4_10 "FH34S-4S-0.5SH" con_hirose_FH34SRJ-4S 12.05,7.5 r0 top (schematic designator J4)
J4_11 "FH34S-4S-0.5SH" con_hirose_FH34SRJ-4S 16.75,7.5 r180 bottom (schematic designator J4)
J4_12 "FH34S-4S-0.5SH" con_hirose_FH34SRJ-4S 16.75,7.5 r0 top (schematic designator J4)
J4_13 "FH34S-4S-0.5SH" con_hirose_FH34SRJ-4S 21.45,7.5 r180 bottom (schematic designator J4)
J4_14 "FH34S-4S-0.5SH" con_hirose_FH34SRJ-4S 21.45,7.5 r0 top (schematic designator J4)
J4_15 "FH34S-4S-0.5SH" con_hirose_FH34SRJ-4S 26.15,7.5 r180 bottom (schematic designator J4)
J4_16 "FH34S-4S-0.5SH" con_hirose_FH34SRJ-4S 26.147,7.5 r0 top (schematic designator J4)
J4_17 "FH34S-4S-0.5SH" con_hirose_FH34SRJ-4S 30.85,7.5 r180 bottom (schematic designator J4)
J4_18 "FH34S-4S-0.5SH" con_hirose_FH34SRJ-4S 30.85,7.5 r0 top (schematic designator J4)
J4_19 "FH34S-4S-0.5SH" con_hirose_FH34SRJ-4S 35.55,7.5 r180 bottom (schematic designator J4)
J4_20 "FH34S-4S-0.5SH" con_hirose_FH34SRJ-4S 35.55,7.5 r0 top (schematic designator J4)
J4_21 "FH34S-4S-0.5SH" con_hirose_FH34SRJ-4S 40.25,7.5 r180 bottom (schematic designator J4)
J4_22 "FH34S-4S-0.5SH" con_hirose_FH34SRJ-4S 40.25,7.5 r0 top (schematic designator J4)
J4_23 "FH34S-4S-0.5SH" con_hirose_FH34SRJ-4S 44.95,7.5 r180 bottom (schematic designator J4)
J4_24 "FH34S-4S-0.5SH" con_hirose_FH34SRJ-4S 44.95,7.5 r0 top (schematic designator J4)
J4_25 "FH34S-4S-0.5SH" con_hirose_FH34SRJ-4S 49.65,7.5 r180 bottom (schematic designator J4)
J4_26 "FH34S-4S-0.5SH" con_hirose_FH34SRJ-4S 49.616,7.5 r0 top (schematic designator J4)
J4_27 "FH34S-4S-0.5SH" con_hirose_FH34SRJ-4S 54.35,7.5 r180 bottom (schematic designator J4)
J4_28 "FH34S-4S-0.5SH" con_hirose_FH34SRJ-4S 54.35,7.5 r0 top (schematic designator J4)
J4_29 "FH34S-4S-0.5SH" con_hirose_FH34SRJ-4S 49.65,-5.4 r180 bottom (schematic designator J4)
J4_30 "FH34S-4S-0.5SH" con_hirose_FH34SRJ-4S 49.65,-5.4 r0 top (schematic designator J4)
J4_31 "FH34S-4S-0.5SH" con_hirose_FH34SRJ-4S 54.35,-5.4 r180 bottom (schematic designator J4)
J4_32 "FH34S-4S-0.5SH" con_hirose_FH34SRJ-4S 54.35,-5.4 r0 top (schematic designator J4)
J5 "DF40HC(3.0)-100DS-0.4V" con100_hirose-df40c-100ds_129h 28.54,-2.64 r180 top locked
M1 "MTGC425H215P" MTGC425H215P 0,0 r0 top
M2 "MTGC425H215P" MTGC425H215P 57,0 r0 top
R1_1 "10K" 0402-IPCsm_40 0,-7.928 r90 bottom (schematic designator R1)
R1_2 "10K" 0402-IPCsm_40 0,-6 r270 top (schematic designator R1)
R1_3 "10K" 0402-IPCsm_40 10,-6 r270 bottom (schematic designator R1)
R1_4 "10K" 0402-IPCsm_40 9.997,-7.734 r90 top (schematic designator R1)
R1_5 "10K" 0402-IPCsm_40 1.35,3.315 r0 bottom (schematic designator R1)
R1_6 "10K" 0402-IPCsm_40 3.054,3.265 r180 top (schematic designator R1)
R1_7 "10K" 0402-IPCsm_40 6,3.294 r0 bottom (schematic designator R1)
R1_8 "10K" 0402-IPCsm_40 7.754,3.269 r180 top (schematic designator R1)
R1_9 "10K" 0402-IPCsm_40 10.75,3.294 r0 bottom (schematic designator R1)
R1_10 "10K" 0402-IPCsm_40 12.454,3.269 r180 top (schematic designator R1)
R1_11 "10K" 0402-IPCsm_40 15.45,3.294 r0 bottom (schematic designator R1)
R1_12 "10K" 0402-IPCsm_40 17.154,3.269 r180 top (schematic designator R1)
R1_13 "10K" 0402-IPCsm_40 20.15,3.294 r0 bottom (schematic designator R1)
R1_14 "10K" 0402-IPCsm_40 21.854,3.269 r180 top (schematic designator R1)
R1_15 "10K" 0402-IPCsm_40 24.85,3.294 r0 bottom (schematic designator R1)
R1_16 "10K" 0402-IPCsm_40 26.55,3.265 r180 top (schematic designator R1)
R1_17 "10K" 0402-IPCsm_40 29.55,3.294 r0 bottom (schematic designator R1)
R1_18 "10K" 0402-IPCsm_40 31.279,3.265 r180 top (schematic designator R1)
R1_19 "10K" 0402-IPCsm_40 34.25,3.315 r0 bottom (schematic designator R1)
R1_20 "10K" 0402-IPCsm_40 35.979,3.265 r180 top (schematic designator R1)
R1_21 "10K" 0402-IPCsm_40 39,3.294 r0 bottom (schematic designator R1)
R1_22 "10K" 0402-IPCsm_40 40.679,3.29 r180 top (schematic designator R1)
R1_23 "10K" 0402-IPCsm_40 43.672,3.294 r0 bottom (schematic designator R1)
R1_24 "10K" 0402-IPCsm_40 45.354,3.265 r180 top (schematic designator R1)
R1_25 "10K" 0402-IPCsm_40 48.322,3.294 r0 bottom (schematic designator R1)
R1_26 "10K" 0402-IPCsm_40 50.02,3.294 r180 top (schematic designator R1)
R1_27 "10K" 0402-IPCsm_40 53.054,3.294 r0 bottom (schematic designator R1)
R1_28 "10K" 0402-IPCsm_40 54.754,3.269 r180 top (schematic designator R1)
R1_29 "10K" 0402-IPCsm_40 47.105,-7.8 r90 bottom (schematic designator R1)
R1_30 "10K" 0402-IPCsm_40 47,-6.028 r270 top (schematic designator R1)
R1_31 "10K" 0402-IPCsm_40 57,-6.05 r270 bottom (schematic designator R1)
R1_32 "10K" 0402-IPCsm_40 57,-7.797 r90 top (schematic designator R1)
R2_1 "10K" 0402-IPCsm_40 0,-6.15 r270 bottom (schematic designator R2)
R2_2 "10K" 0402-IPCsm_40 0,-7.734 r90 top (schematic designator R2)
R2_3 "10K" 0402-IPCsm_40 10.008,-7.928 r90 bottom (schematic designator R2)
R2_4 "10K" 0402-IPCsm_40 9.997,-5.956 r270 top (schematic designator R2)
R2_5 "10K" 0402-IPCsm_40 3.128,3.315 r180 bottom (schematic designator R2)
R2_6 "10K" 0402-IPCsm_40 1.276,3.265 r0 top (schematic designator R2)
R2_7 "10K" 0402-IPCsm_40 7.778,3.294 r180 bottom (schematic designator R2)
R2_8 "10K" 0402-IPCsm_40 5.976,3.269 r0 top (schematic designator R2)
R2_9 "10K" 0402-IPCsm_40 12.528,3.294 r180 bottom (schematic designator R2)
R2_10 "10K" 0402-IPCsm_40 10.676,3.269 r0 top (schematic designator R2)
R2_11 "10K" 0402-IPCsm_40 17.228,3.294 r180 bottom (schematic designator R2)
R2_12 "10K" 0402-IPCsm_40 15.376,3.269 r0 top (schematic designator R2)
R2_13 "10K" 0402-IPCsm_40 21.928,3.294 r180 bottom (schematic designator R2)
R2_14 "10K" 0402-IPCsm_40 20.076,3.269 r0 top (schematic designator R2)
R2_15 "10K" 0402-IPCsm_40 26.628,3.294 r180 bottom (schematic designator R2)
R2_16 "10K" 0402-IPCsm_40 24.772,3.265 r0 top (schematic designator R2)
R2_17 "10K" 0402-IPCsm_40 31.328,3.294 r180 bottom (schematic designator R2)
R2_18 "10K" 0402-IPCsm_40 29.501,3.265 r0 top (schematic designator R2)
R2_19 "10K" 0402-IPCsm_40 36.028,3.315 r180 bottom (schematic designator R2)
R2_20 "10K" 0402-IPCsm_40 34.201,3.265 r0 top (schematic designator R2)
R2_21 "10K" 0402-IPCsm_40 40.778,3.294 r180 bottom (schematic designator R2)
R2_22 "10K" 0402-IPCsm_40 38.901,3.29 r0 top (schematic designator R2)
R2_23 "10K" 0402-IPCsm_40 45.45,3.294 r180 bottom (schematic designator R2)
R2_24 "10K" 0402-IPCsm_40 43.576,3.265 r0 top (schematic designator R2)
R2_25 "10K" 0402-IPCsm_40 50.1,3.294 r180 bottom (schematic designator R2)
R2_26 "10K" 0402-IPCsm_40 48.242,3.294 r0 top (schematic designator R2)
R2_27 "10K" 0402-IPCsm_40 54.832,3.294 r180 bottom (schematic designator R2)
R2_28 "10K" 0402-IPCsm_40 52.976,3.269 r0 top (schematic designator R2)
R2_29 "10K" 0402-IPCsm_40 47.105,-6.014 r270 bottom (schematic designator R2)
R2_30 "10K" 0402-IPCsm_40 47,-7.797 r90 top (schematic designator R2)
R2_31 "10K" 0402-IPCsm_40 57,-7.828 r90 bottom (schematic designator R2)
R2_32 "10K" 0402-IPCsm_40 57,-6.028 r270 top (schematic designator R2)

## Footprints (in the part's own frame and the unit in brackets; to place one, negate y for a bottom-side part, rotate by r counter-clockwise, add the part's x,y. Pads: shape width x height; smd on the part's side, far side on the other; paste and mask are expansions set on the pad)
0402-IPCsm_40 [mm] "0402-IPCSM_40"
  rect 0.5x0.52 smd: 1(-0.45,0) 2(0.45,0)
  silkscreen extent 0,-0.3 0,0.3
con100_hirose-df40c-100ds_129h [mm] "CONN RCPT 100POS 0.4MM SMD GOLD"
  rect 0.2x0.7 smd mask+0: 1(9.8,1.54) 2(9.8,-1.54) 3(9.4,1.54) 4(9.4,-1.54) 5(9,1.54) 6(9,-1.54) 7(8.6,1.54) 8(8.6,-1.54) 9(8.2,1.54) 10(8.2,-1.54) 11(7.8,1.54) 12(7.8,-1.54) 13(7.4,1.54) 14(7.4,-1.54) 15(7,1.54) 16(7,-1.54) 17(6.6,1.54) 18(6.6,-1.54) 19(6.2,1.54) 20(6.2,-1.54) 21(5.8,1.54) 22(5.8,-1.54) 23(5.4,1.54) 24(5.4,-1.54) 25(5,1.54) 26(5,-1.54) 27(4.6,1.54) 28(4.6,-1.54) 29(4.2,1.54) 30(4.2,-1.54) 31(3.8,1.54) 32(3.8,-1.54) 33(3.4,1.54) 34(3.4,-1.54) 35(3,1.54) 36(3,-1.54) 37(2.6,1.54) 38(2.6,-1.54) 39(2.2,1.54) 40(2.2,-1.54) 41(1.8,1.54) 42(1.8,-1.54) 43(1.4,1.54) 44(1.4,-1.54) 45(1,1.54) 46(1,-1.54) 47(0.6,1.54) 48(0.6,-1.54) 49(0.2,1.54) 50(0.2,-1.54) 51(-0.2,1.54) 52(-0.2,-1.54) 53(-0.6,1.54) 54(-0.6,-1.54) 55(-1,1.54) 56(-1,-1.54) 57(-1.4,1.54) 58(-1.4,-1.54) 59(-1.8,1.54) 60(-1.8,-1.54) 61(-2.2,1.54) 62(-2.2,-1.54) 63(-2.6,1.54) 64(-2.6,-1.54) 65(-3,1.54) 66(-3,-1.54) 67(-3.4,1.54) 68(-3.4,-1.54) 69(-3.8,1.54) 70(-3.8,-1.54) 71(-4.2,1.54) 72(-4.2,-1.54) 73(-4.6,1.54) 74(-4.6,-1.54) 75(-5,1.54) 76(-5,-1.54) 77(-5.4,1.54) 78(-5.4,-1.54) 79(-5.8,1.54) 80(-5.8,-1.54) 81(-6.2,1.54) 82(-6.2,-1.54) 83(-6.6,1.54) 84(-6.6,-1.54) 85(-7,1.54) 86(-7,-1.54) 87(-7.4,1.54) 88(-7.4,-1.54) 89(-7.8,1.54) 90(-7.8,-1.54) 91(-8.2,1.54) 92(-8.2,-1.54) 93(-8.6,1.54) 94(-8.6,-1.54) 95(-9,1.54) 96(-9,-1.54) 97(-9.4,1.54) 98(-9.4,-1.54) 99(-9.8,1.54) 100(-9.8,-1.54)
  silkscreen extent -11.43,-1.52 11.81,1.52
con_hirose_FH34SRJ-4S [mm] "CON_HIROSE_FH34SRJ-4S"
  rect 0.3x0.8 smd mask+0: 1(-0.75,-2.75) 2(-0.25,-2.75) 3(0.25,-2.75) 4(0.75,-2.75)
  rect 0.4x0.8 smd mask+0: 5(-1.75,-0.25) 6(1.75,-0.25)
  silkscreen extent -2,-3.39 2,0
MTGC425H215P [mm] "MTGC425H215P"
  round 4.25 hole 2.15: 1(0,0)